# Altium PCB control plate - conversion layers.pcbdoc
Units mm, origin at the board's own origin, x right, y up, seen from the top; angles counter-clockwise.
Board outline 400 x 240 mm, 2 copper layers (Top Layer, Bottom Layer); 16 components, 0 nets, 0 pads, 0 vias.
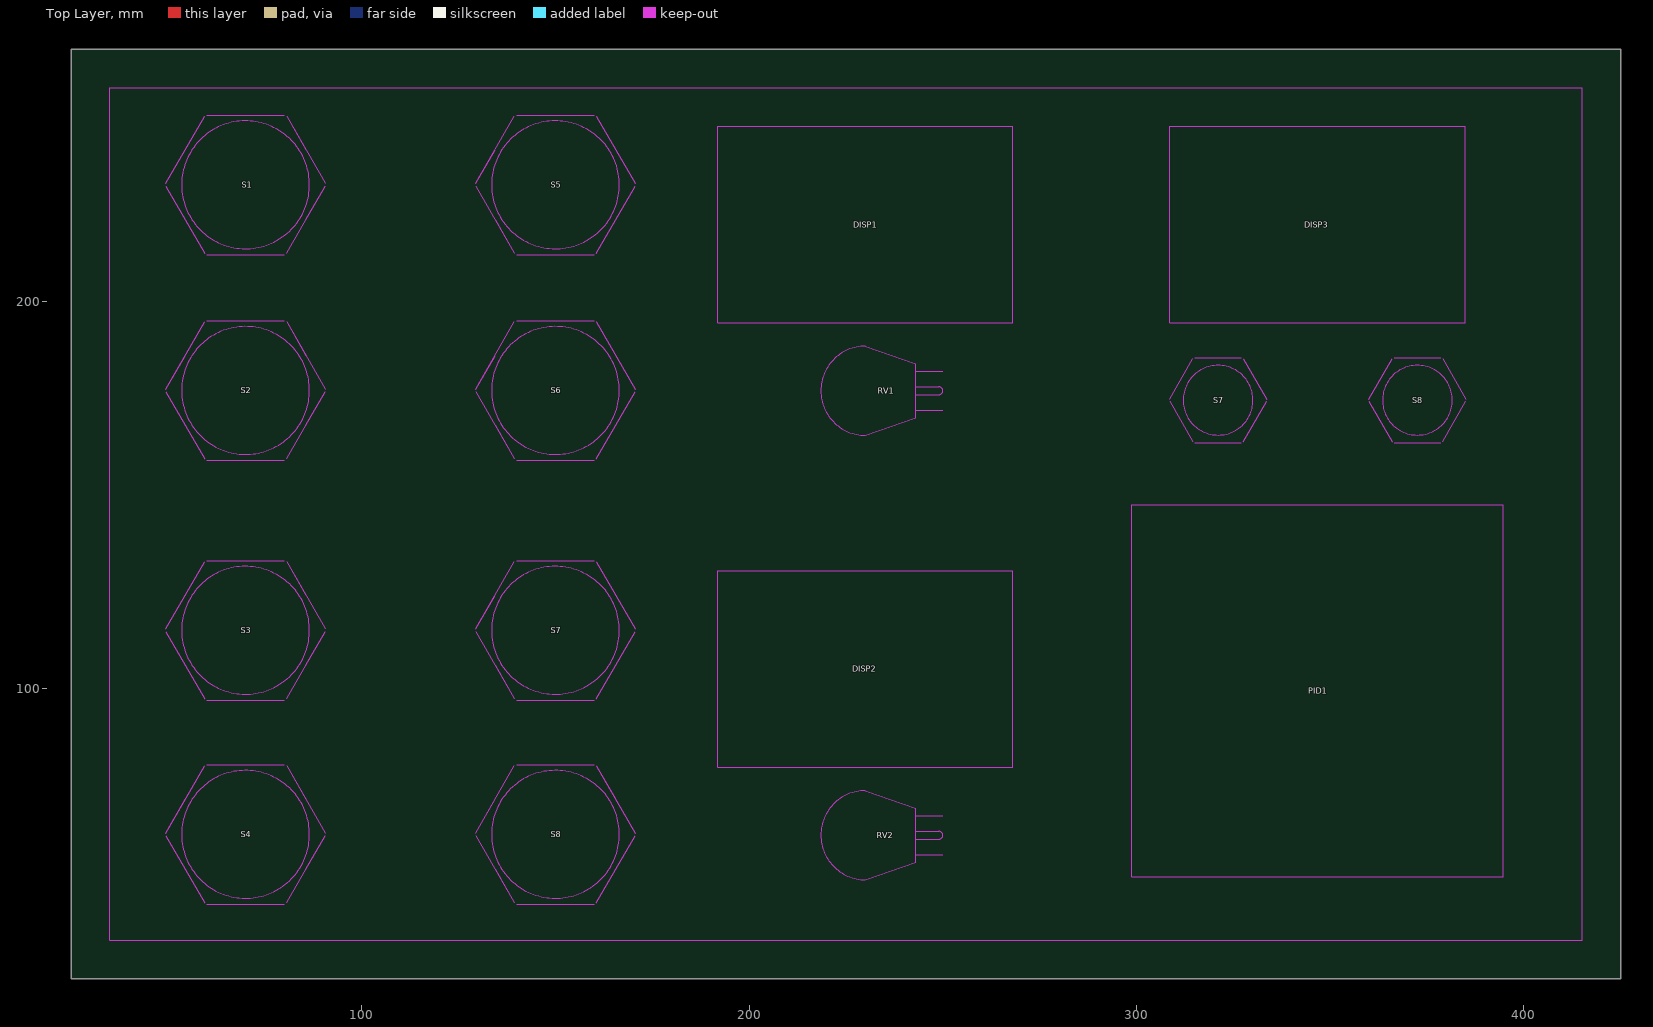
[diagram p0: Top Layer view]
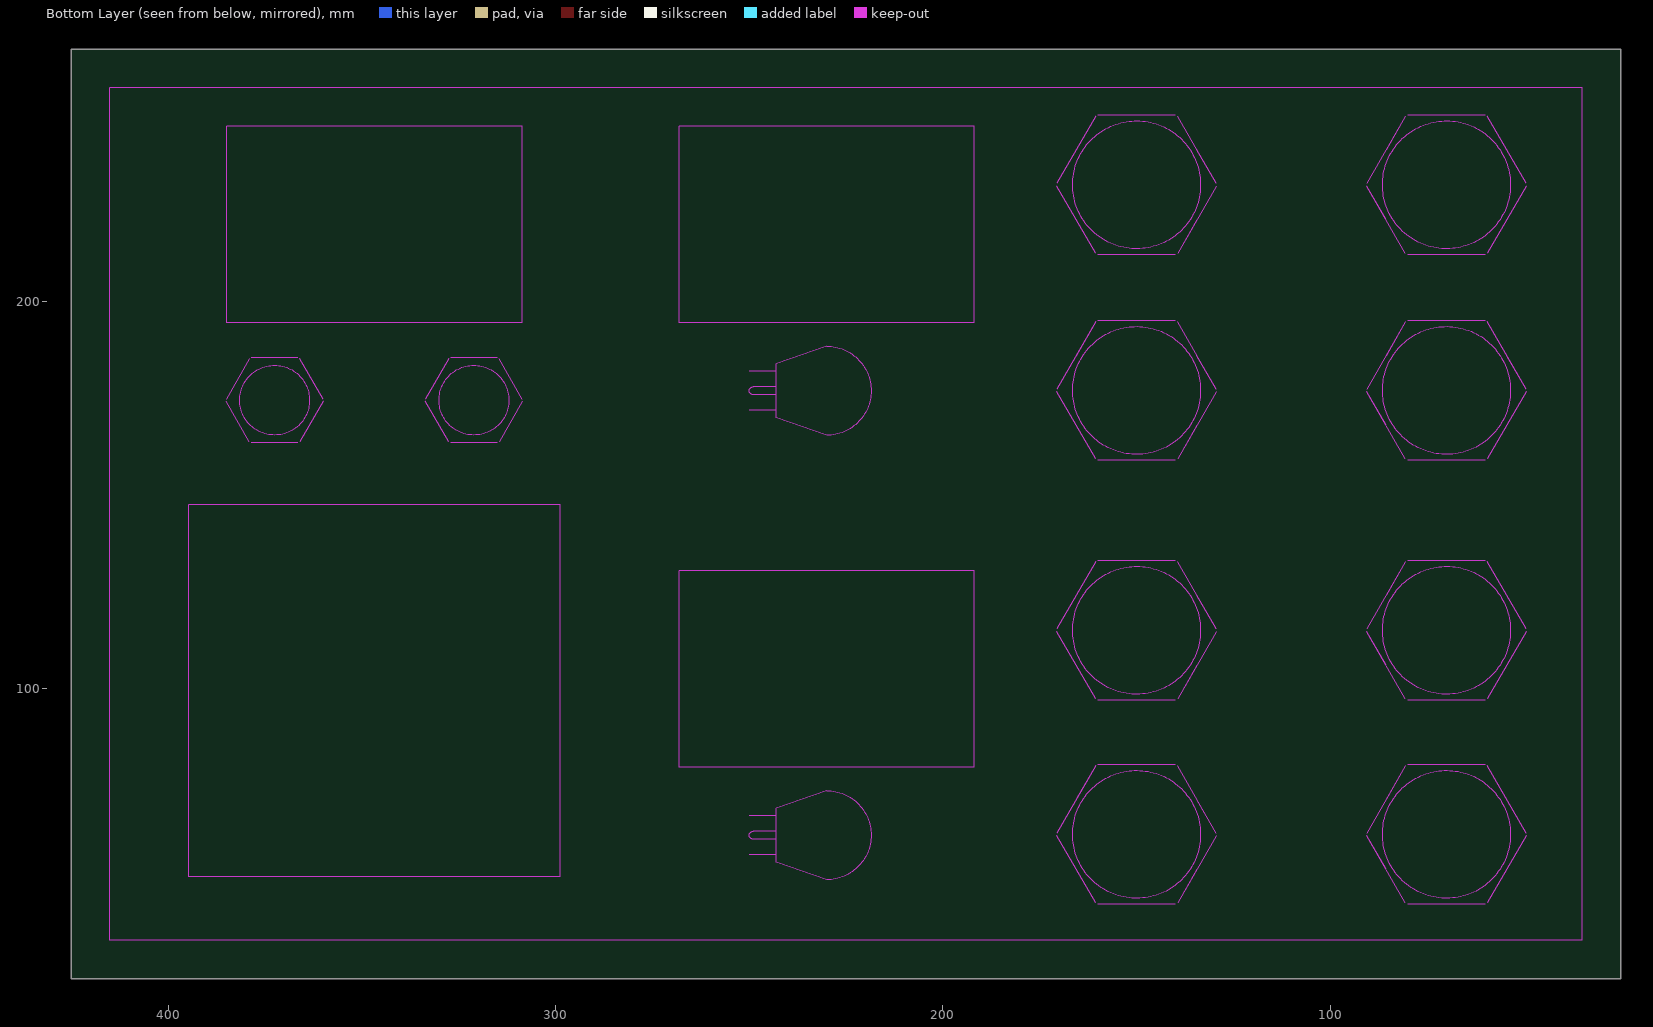
[diagram p1: Bottom Layer view, seen from below]

## Layer stack, top to bottom
Top Layer: signal copper 0.0356
Dielectric: dielectric 0.32, FR-4, Dk 4.8
Bottom Layer: signal copper 0.0356

## Board outline
25,25 25,265 425,265 425,25

## Design rules (kind name [scope] priority, off if disabled: settings)
Clearance [All] p1: gap=0.254
PolygonConnect [All] p1: connectstyle=Relief reliefconductorwidth=0.254 reliefentries=4 polygonreliefangle="90 Angle"
RoutingVias [All] p1: holewidth=0.711 width=1.27 viastyle="Through Hole" minholewidth=0.711 minwidth=1.27 maxholewidth=0.711 maxwidth=1.27
SilkscreenOverComponentPads [All] p1: minsilkscreentomaskgap=0.254
SolderMaskExpansion [All] p1: expansion=0.102
Width [All] p1: maxlimit=0.254 minlimit=0.254 preferedwidth=0.254
27 further rules are at their usual default settings.

## Components (designator, comment, footprint, x,y, rotation, side; value= is the part's Value field where it differs from the comment)
DISP1 "Comment" "DISPLAY MODULE" 230,219.721 r0 top
DISP2 "Comment" "DISPLAY MODULE" 230,105 r0 top
DISP3 "Comment" "DISPLAY MODULE" 346.71,219.71 r0 top
PID1 "Comment" "PID CONTROLLER" 346.71,99.441 r0 top
RV1 "Comment" POTENTIOMETER 230,176.833 r90 top
RV2 "Comment" POTENTIOMETER 230,62.112 r90 top
S1 "Comment" "33MM BUTTON" 70,230 r0 top
S2 "Comment" "33MM BUTTON" 70,176.927 r0 top
S3 "Comment" "33MM BUTTON" 70,115 r0 top
S4 "Comment" "33MM BUTTON" 70,62.333 r0 top
S5 "Comment" "33MM BUTTON" 150,230 r0 top
S6 "Comment" "33MM BUTTON" 150,176.927 r0 top
S7 "Comment" "18MM BUTTON" 321.056,174.4 r0 top
S7 "Comment" "33MM BUTTON" 150,115 r0 top
S8 "Comment" "18MM BUTTON" 372.491,174.4 r0 top
S8 "Comment" "33MM BUTTON" 150,62.333 r0 top

## Footprints (in the part's own frame and the unit in brackets; to place one, negate y for a bottom-side part, rotate by r counter-clockwise, add the part's x,y. Pads: shape width x height; smd on the part's side, far side on the other; paste and mask are expansions set on the pad)
"18MM BUTTON" [mm] "BUGLIN MP0045/1D2"
  Keep-Out Layer circle w0.254: c0,0 r9
  Keep-Out Layer lines w0.254: -12.526,-0.304 -6.526,-10.696 ; -12.526,0.304 -6.526,10.696 ; -6,-11 6,-11 ; -6,11 6,11 ; 6.526,-10.696 12.526,-0.304 ; 6.526,10.696 12.526,0.304
"33MM BUTTON" [mm]
  Keep-Out Layer circle w0.254: c0,0 r16.5
  Keep-Out Layer lines w0.254: -20.588,-0.34 -10.588,-17.66 -15.588,-9 ; -15.588,9 -20.588,0.34 -10.588,17.66 ; -10,-18 10,-18 0,-18 ; 0,18 -10,18 10,18 ; 10.588,-17.66 20.588,-0.34 15.588,-9 ; 15.588,9 10.588,17.66 20.588,0.34
"DISPLAY MODULE" [mm]
  Keep-Out Layer lines w0.254: -38.1,-25.375 38.1,-25.375 38.1,25.425 -38.1,25.425 -38.1,-25.375
"PID CONTROLLER" [mm] "SHIMADEN SR23 SERIES CONTROLLER"
  Keep-Out Layer lines w0.254: -48,-48 48,-48 48,48 -48,48 -48,-48
POTENTIOMETER [mm] "TYCO TW1103KA (Farnell 1502913)"
  Keep-Out Layer lines w0.254: -1,-13 -1,-18 -1,-19 ccw(c0,-19) 1,-19 1,-13 ; -5,-20 -5,-13 0,-13 5,-13 5,-20 ; -11.5,0 cw(c0,0) 11.5,0 7,-13 -7,-13 -11.5,0

## Nets (pads, with @x,y where several pads share a name; then routed paths per layer and width w, separated by ;. In a path a pad name is that pad's centre, name@x,y a point inside that pad or via, vN(x,y) a via of type N, cw(c..) or ccw(c..) an arc to the next point about the centre after c; other vN are vias at no path point)

## Keep-outs
Keep-Out Layer:
  lines w0.254: 35,35 35,255 415,255 415,35 35,35

## Silkscreen, mask and mechanical layers (free items; w line width, h text height)
Mechanical 1:
  lines w0.127: 204.724,244.392 205.511,244.392 ; 205.384,215.392 205.511,215.392
  lines w0.254: 25,25 25,265 425,265 425,25 25,25
Mechanical 2:
  circle w0.254: c230.127,62.165 r14
  circle w0.254: c230,176.886 r14
  lines w0.127: 215,62.165 230,62.165 230,79.665 ; 215,176.886 230,176.886 230,194.386 ; 215.127,62.165 230.127,62.165 230.127,79.665 ; 295.44,154.94 395.44,154.94 ; 346.71,154.94 346.71,161.29
  lines w0.254: 25,25 425,25 425,265 25,265 25,25
Mechanical 3:
  text "COOLING AGITATOR" at 45.085,254 h10
  text "DRUM" at 143.51,254 h10
  text "START" at 95.25,226.695 h10
  text "START" at 175.25,226.695 h10
  text "DRUM SPEED RPM" at 207.46,204.641 h10
  text "ELAPSED TIME, HH:MM" at 318.585,204.63 h10
  text "START" at 317.126,190.345 h5
  text "STOP" at 369.191,190.345 h5
  text "STOP" at 95.885,173.99 h10
  text "STOP" at 175.885,173.99 h10
  text "PAUSE" at 316.491,155.265 h5
  text "RESET" at 368.556,155.265 h5
  text "COOLING FAN" at 53.975,139.7 h10
  text "ROAST FAN" at 135.89,139.7 h10
  text "START" at 95.25,112.101 h10
  text "START" at 175.25,112.101 h10
  text "ROAST FAN SPEED" at 207.46,89.92 h10
  text "STOP" at 95.885,59.396 h10
  text "STOP" at 175.885,59.396 h10

## Text inside footprints (layer, text, board x,y; h text height)
DISP1: Mechanical 1 "CUT OUT" at 214,224.721 h5; Mechanical 2 "CUT OUT" at 213.75,217.221 h5
DISP2: Mechanical 1 "CUT OUT" at 214,110 h5; Mechanical 2 "CUT OUT" at 213.75,102.5 h5
DISP3: Mechanical 1 "CUT OUT" at 330.71,224.71 h5; Mechanical 2 "CUT OUT" at 330.46,217.21 h5
PID1: Mechanical 1 "CUT OUT" at 330.71,100.441 h5; Mechanical 2 "CUT OUT" at 331.46,91.441 h5
RV1: Mechanical 1 "OUT" at 233,174.083 h2 r90; Mechanical 1 "CUT" at 229,174.083 h2 r90; Mechanical 2 "CUT OUT" at 240.25,166.583 h3 r90
RV2: Mechanical 1 "OUT" at 233,59.362 h2 r90; Mechanical 1 "CUT" at 229,59.362 h2 r90; Mechanical 2 "CUT OUT" at 240.25,51.862 h3 r90
S1: Mechanical 1 "CUT OUT" at 60.25,228.75 h3; Mechanical 2 "CUT OUT" at 54.25,223.5 h5
S2: Mechanical 1 "CUT OUT" at 60.25,175.677 h3; Mechanical 2 "CUT OUT" at 54.25,170.427 h5
S3: Mechanical 1 "CUT OUT" at 60.25,113.75 h3; Mechanical 2 "CUT OUT" at 54.25,108.5 h5
S4: Mechanical 1 "CUT OUT" at 60.25,61.083 h3; Mechanical 2 "CUT OUT" at 54.25,55.833 h5
S5: Mechanical 1 "CUT OUT" at 140.25,228.75 h3; Mechanical 2 "CUT OUT" at 134.25,223.5 h5
S6: Mechanical 1 "CUT OUT" at 140.25,175.677 h3; Mechanical 2 "CUT OUT" at 134.25,170.427 h5
S7: Mechanical 1 "CUT OUT" at 314.556,173.4 h2; Mechanical 2 "CUT OUT" at 314.556,170.4 h2
S7: Mechanical 1 "CUT OUT" at 140.25,113.75 h3; Mechanical 2 "CUT OUT" at 134.25,108.5 h5
S8: Mechanical 1 "CUT OUT" at 365.991,173.4 h2; Mechanical 2 "CUT OUT" at 365.991,170.4 h2
S8: Mechanical 1 "CUT OUT" at 140.25,61.083 h3; Mechanical 2 "CUT OUT" at 134.25,55.833 h5